# EAGLE board Thermocouple1 (EAGLE 9.6.2)
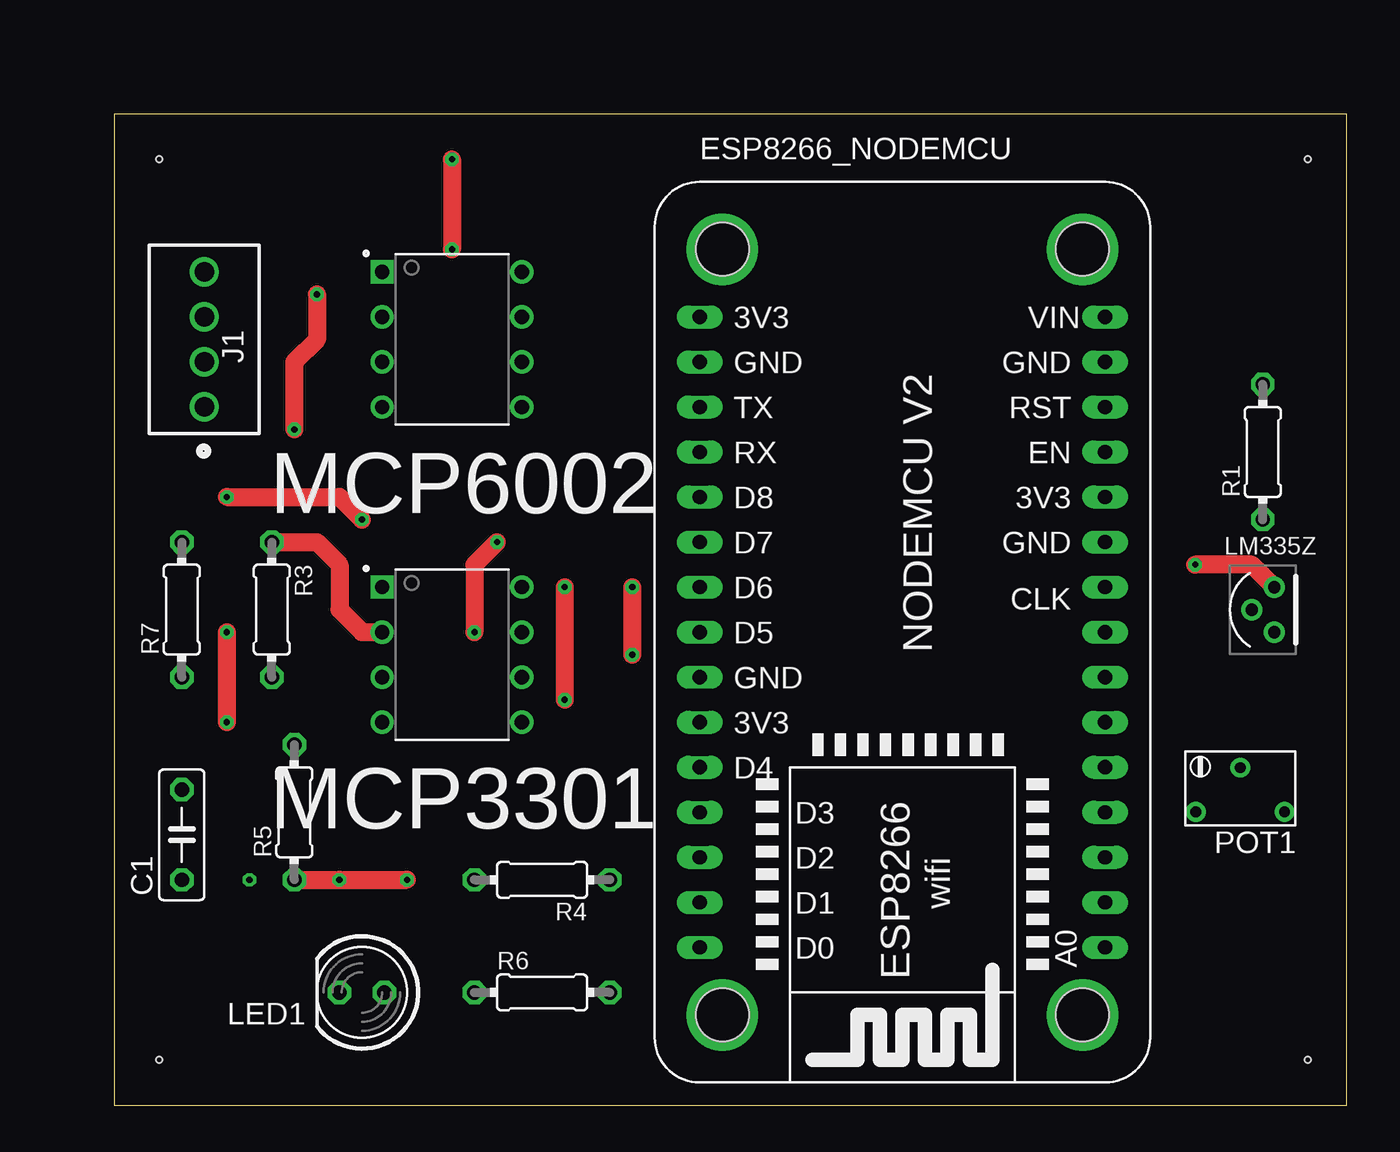
[diagram p0: board, top side]
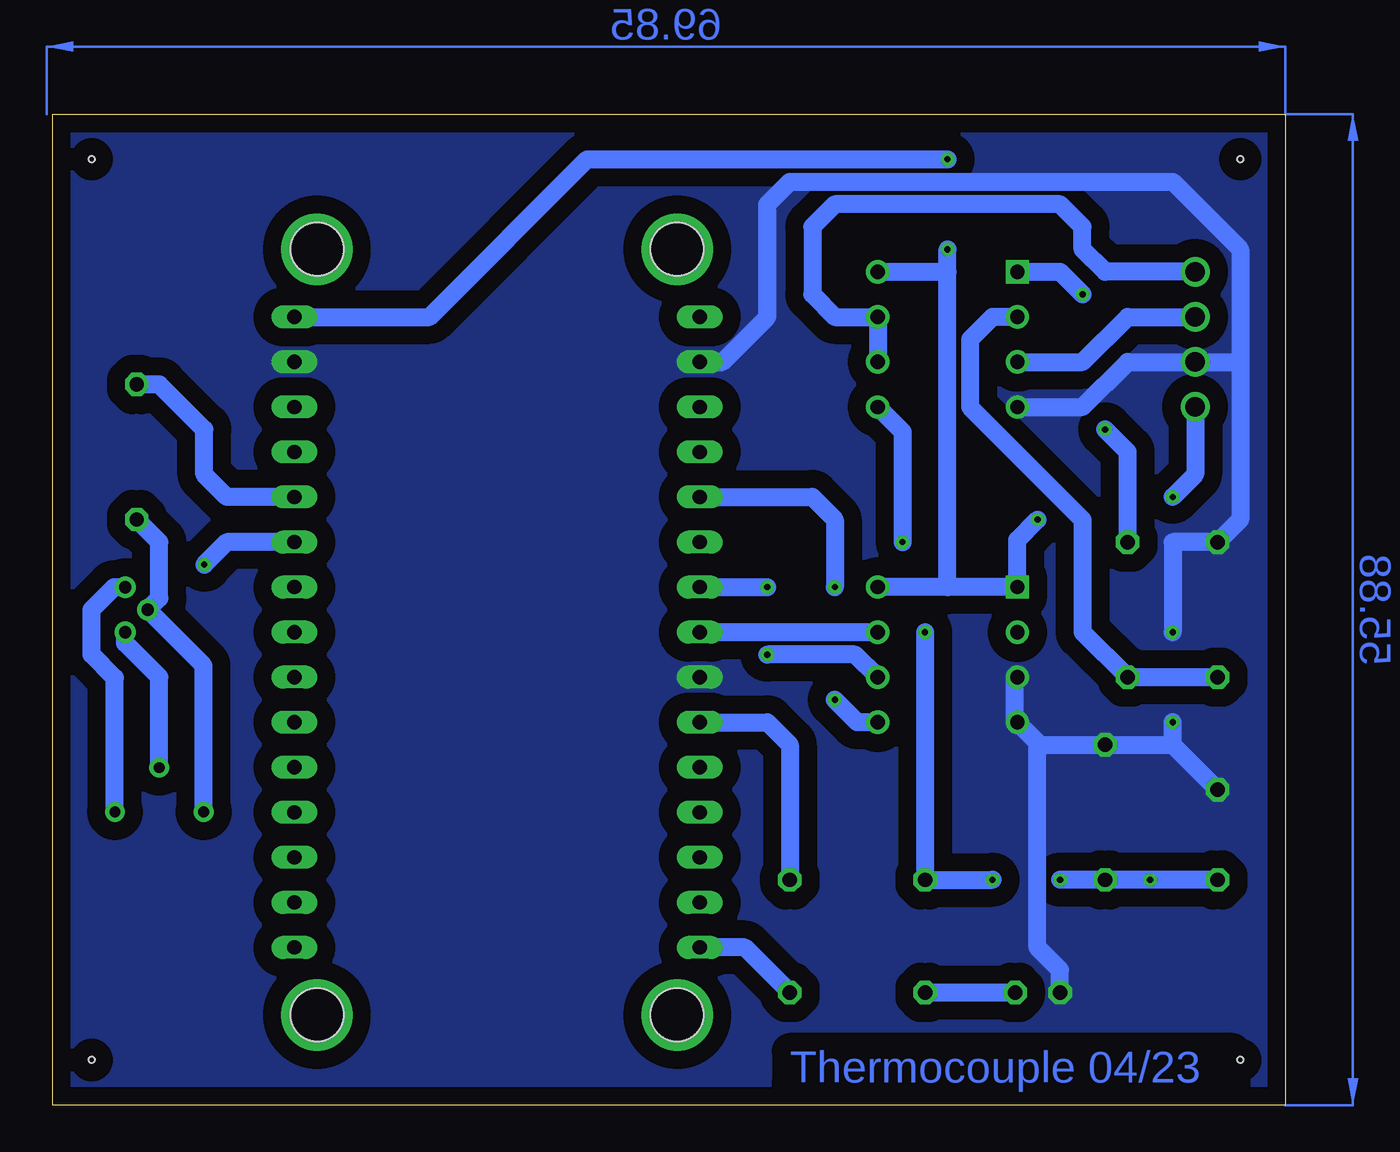
[diagram p1: board, bottom side, seen from below]

Size 69.52 x 55.87 mm. Coordinates in mm from the lower left corner, seen from the top.
Outline: 0,0 69.52,0 69.52,55.87 0,55.87 0,0
Copper layers (1*16): Top 0.035mm / dielectric 1.5mm / Bottom 0.035mm
Design rules "default": minimum track width 6mil, minimum drill 0.35mm, track to track 6mil, track to pad 6mil, pad to pad 6mil, via to via 6mil, smd to smd 6mil, copper to edge 40mil, drill to drill 6mil, minimum pad ring 10mil, minimum via ring 8mil, stop-mask expansion 4mil, vias tented up to drill 0mil, thermal gap 10mil
Holes 0.35 mm at 2.54,53.34 67.31,53.34 2.54,2.54 67.31,2.54

## Footprints (pad centres in the part's own frame; a part is rotated, then mirrored left to right if it is on the bottom)
C050-025X075 = drill 0.813 octagon: 1 -2.54,0; 2 2.54,0
NODEMCU_ESP8266 = drill 0.8 long: 3V3@1 -11.43,19.05; 3V3@2 -11.43,-3.81; 3V3@3 11.43,8.89; A0 11.43,-16.51; CLK 11.43,3.81; CMD 11.43,-1.27; D0 -11.43,-16.51; D1 -11.43,-13.97; D2 -11.43,-11.43; D3 -11.43,-8.89; D4 -11.43,-6.35; D5 -11.43,1.27; D6 -11.43,3.81; D7 -11.43,6.35; D8 -11.43,8.89; EN 11.43,11.43; GND@1 -11.43,16.51; GND@2 -11.43,-1.27; GND@3 11.43,6.35; GND@4 11.43,16.51; RST 11.43,13.97; RSV1 11.43,-11.43; RSV2 11.43,-13.97; RX -11.43,11.43; SD1 11.43,-3.81; SD2 11.43,-6.35; SD3 11.43,-8.89; SDO 11.43,1.27; TX -11.43,13.97; VIN 11.43,19.05 | drill 3: P$31 10.16,22.86; P$32 -10.16,22.86; P$33 -10.16,-20.32; P$34 10.16,-20.32 | hole 3: 10.16,22.86; 10.16,-20.32; -10.16,-20.32; -10.16,22.86
1725672-4-2.54 = drill 1.1 pad 1.65: 1 0,0; 2 2.54,0; 3 5.08,0; 4 7.62,0
LED5MM = drill 0.813 octagon: A -1.27,0; K 1.27,0
STMICROELECTRONICS_LM335Z_0 = drill 0.7 pad 1.2: 1 -0.62,0; 2 0.65,-1.27; 3 0.65,1.27
DIP787W46P254L927H533Q8 = drill 0.8 square: 1 -3.935,3.81 | drill 0.8: 2 -3.935,1.27; 3 -3.935,-1.27; 4 -3.935,-3.81; 5 3.935,-3.81; 6 3.935,-1.27; 7 3.935,1.27; 8 3.935,3.81
RTRIM74W = drill 0.61: 1 -1.25,-2.5; 2 1.25,0; 3 -1.25,2.5
0204/7 = drill 0.813 octagon: 1 -3.81,0; 2 3.81,0

## Placement (x,y rotation side)
C1  100nF  [C050-025X075]  3.81,15.24 90 top
ESP8266_NODEMCU  NODEMCU_ESP8266  [NODEMCU_ESP8266]  44.45,25.4 0 top
J1  1725672  [1725672-4-2.54]  5.08,39.37 90 top
LED1  [LED5MM]  13.97,6.35 180 top
LM335Z  STMICROELECTRONICS_LM335ZSTMICROELECTRONICS_LM335Z_0_0  [STMICROELECTRONICS_LM335Z_0]  64.77,27.94 0 top
MCP3301  MCP3301-CI/P  [DIP787W46P254L927H533Q8]  19.05,25.4 0 top
MCP6002  MCP6002-I/P  [DIP787W46P254L927H533Q8]  19.05,43.18 0 top
POT1  [RTRIM74W]  63.5,17.78 90 top
R1  600Ω  [0204/7]  64.77,36.83 90 top
R3  [0204/7]  8.89,27.94 270 top
R4  30kΩ  [0204/7]  24.13,12.7 180 top
R5  10kΩ  [0204/7]  10.16,16.51 90 top
R6  220Ω  [0204/7]  24.13,6.35 0 top
R7  [0204/7]  3.81,27.94 90 top

## Library data of the parts
C1 = rcl; SPICEPREFIX: C
ESP8266_NODEMCU = nodemcu_esp8266
J1 = 1725672; AVAILABILITY: In Stock; DESCRIPTION: ROHS / BORNIER FIXE CI 1RX4C / TYPE MPT 0-5/ 4-2-54 / BOX 50 PCS; MF: Phoenix Contact; MP: 17 25 67 2; PACKAGE: None; PRICE: None
LED1 = led
LM335Z = LM335Z_st; CENTROID_NOT_SPECIFIED: No; DATASHEET: http://www.st.com/content/ccc/resource/technical/document/datasheet/04/fa/9d/16/39/87/44/8d/CD00000459.pdf/files/CD00000459.pdf/jcr:content/translations/en.CD00000459.pdf; DIGIKEY_DESCRIPTION: IC SENSOR TEMP ANLG VOLT TO-92-3; DIGIKEY_PART_NUMBER: 497-1584-ND; IPC_LAND_PATTERN_NAME: TO-92; LEAD_FREE: yes; MF: STMicroelectronics; MOUSER_PART_NUMBER: 511-LM335Z; MPN: LM335Z; PACKAGE: TO-92-3; PREFIX: U; ROHS: yes; TEMPERATURE_RANGE_HIGH: +100°C; TEMPERATURE_RANGE_LOW: -40°C
MCP3301 = MCP3301-CI_P; AVAILABILITY: In Stock; DESCRIPTION: 13 Bit Analog to Digital Converter 1 Input 1 SAR 8-PDIP; MF: Microchip; MP: MCP3301-CI/P; PACKAGE: DIP-8 Microchip; PRICE: None; PURCHASE-URL: https://pricing.snapeda.com/search/part/MCP3301-CI/P/?ref=eda
MCP6002 = MCP6002-I_P; AVAILABILITY: In Stock; DESCRIPTION: General Purpose Amplifier 2 Circuit Rail-to-Rail 8-PDIP; MF: Microchip; MP: MCP6002-I/P; PACKAGE: DIP-8 Microchip; PRICE: None; PURCHASE-URL: https://pricing.snapeda.com/search/part/MCP6002-I/P/?ref=eda
POT1 = rcl; SPICEMODEL: X; SPICEPREFIXL: POT
R1 R3-R7 = rcl; SPICEPREFIX: R

## Nets
3V3: ESP8266_NODEMCU.3V3@1
GND: C1.2 ESP8266_NODEMCU.GND@1 ESP8266_NODEMCU.GND@2 ESP8266_NODEMCU.GND@4 J1.2 LED1.K MCP3301.3 MCP3301.4 MCP6002.4 R5.2 R7.2
N$1: ESP8266_NODEMCU.D5 MCP3301.7
N$2: ESP8266_NODEMCU.GND@3 LM335Z.3 POT1.1
N$3: ESP8266_NODEMCU.D6 MCP3301.6
N$4: ESP8266_NODEMCU.D8 MCP3301.5
N$5: MCP3301.2 MCP6002.1 R3.1
N$6: LED1.A R6.1
N$7: C1.1 MCP6002.5 R4.2 R5.1
N$8: ESP8266_NODEMCU.3V3@3 R1.2
N$9: J1.3 MCP6002.3
N$10: LM335Z.1 POT1.3 R1.1
N$11: LM335Z.2 POT1.2
N$12: J1.4 MCP6002.6 MCP6002.7
N$13: ESP8266_NODEMCU.3V3@2 R4.1
N$14: MCP6002.2 R3.2 R7.1
N$15: ESP8266_NODEMCU.D0 R6.2
VCC: ESP8266_NODEMCU.VIN J1.1 MCP3301.1 MCP3301.8 MCP6002.8

## Tracks (layer width: path | path; a pad name or v marks a point on that pad's centre or on a via)
GND  (via drill 0.35)
  Top 1.016: v6.35,26.67 v6.35,21.59
  Bottom 1.016: MCP6002.4 11.43,39.37 8.89,41.91 J1.2 2.54,41.91 | 2.54,41.91 2.54,33.02 R7.2 6.35,31.75 v6.35,26.67 | R5.2 6.35,20.32 | 6.35,20.32 v6.35,21.59 | C1.2 6.35,20.32 | ESP8266_NODEMCU.GND@1 31.75,41.91 29.21,44.45 29.21,50.8 27.94,52.07 6.35,52.07 2.54,48.26 2.54,41.91 | R5.2 10.29,20.45 | 15.24,24.13 15.24,21.71 MCP3301.4 13.85,20.32 | 13.85,20.32 R5.2 | LED1.K 12.7,7.62 13.97,8.89 13.97,20.2 13.85,20.32
  pour Bottom (isolate 1.016, no thermals): 0,0 0,55.88 69.85,55.88 69.85,0
N$1
  Bottom 1.016: ESP8266_NODEMCU.D5 MCP3301.7
N$2  (via drill 0.35)
  Top 1.016: LM335Z.3 64.15,30.48 v60.96,30.48
  Bottom 1.016: POT1.1 66,24.09 67.31,25.4 67.31,27.94 66.04,29.21 LM335Z.3 | ESP8266_NODEMCU.GND@3 59.69,31.75 v60.96,30.48
N$3  (via drill 0.35)
  Top 1.016: v29.21,29.21 v29.21,25.4
  Bottom 1.016: ESP8266_NODEMCU.D6 v29.21,29.21 | MCP3301.6 24.25,25.4 v29.21,25.4
N$4  (via drill 0.35)
  Top 1.016: v25.4,29.21 v25.4,22.86
  Bottom 1.016: v25.4,29.21 25.4,33.02 26.67,34.29 ESP8266_NODEMCU.D8 | MCP3301.5 24.13,21.59 v25.4,22.86
N$5  (via drill 0.35)
  Top 1.016: v11.43,45.72 11.43,43.18 10.16,41.91 v10.16,38.1 | R3.1 11.43,31.75 12.7,30.48 12.7,27.94 13.97,26.67 MCP3301.2
  Bottom 1.016: v11.43,45.72 12.7,46.99 MCP6002.1 | R3.1 8.89,36.83 v10.16,38.1
N$6
  Bottom 1.016: R6.1 LED1.A
N$7  (via drill 0.35)
  Top 1.016: v21.59,31.75 20.32,30.48 v20.32,26.67 | v16.51,12.7 v12.7,12.7 R5.1
  Bottom 1.016: C1.1 v7.62,12.7 v12.7,12.7 | MCP6002.5 21.59,37.98 v21.59,31.75 | v16.51,12.7 R4.2 v20.32,26.67
N$8
  Bottom 1.016: ESP8266_NODEMCU.3V3@3 59.69,34.29 60.96,35.56 60.96,38.1 63.5,40.64 R1.2
N$9
  Bottom 1.016: MCP6002.3 11.43,41.91 8.89,44.45 J1.3
N$10
  Bottom 1.016: R1.1 63.5,31.75 63.5,28.59 LM335Z.1 61,24.79 POT1.3
N$11
  Bottom 1.016: POT1.2 63.5,24.13 65.42,26.05 LM335Z.2
N$12
  Bottom 1.016: J1.4 10.16,46.99 11.43,48.26 11.43,49.53 12.7,50.8 25.4,50.8 26.67,49.53 26.67,45.72 25.4,44.45 MCP6002.7 MCP6002.6
N$13
  Bottom 1.016: ESP8266_NODEMCU.3V3@2 29.21,21.59 27.94,20.32 R4.1
N$14
  Bottom 1.016: R7.1 R3.2 11.43,26.67 11.43,33.02 17.78,39.37 17.78,43.18 16.51,44.45 MCP6002.2
N$15
  Bottom 1.016: R6.2 30.48,8.89 ESP8266_NODEMCU.D0
VCC  (via drill 0.35)
  Top 1.016: v6.35,34.29 12.7,34.29 v13.97,33.02 | v19.05,53.34 v19.05,48.26
  Bottom 1.016: 19.05,29.21 MCP3301.1 15.11,31.88 v13.97,33.02 | 19.05,29.21 MCP3301.8 | v6.35,34.29 5.08,35.56 J1.1 | 19.05,29.21 19.05,46.99 | 19.05,46.99 v19.05,48.26 | MCP6002.8 19.05,46.99 | ESP8266_NODEMCU.VIN 48.26,44.45 39.37,53.34 v19.05,53.34
(copper drawn outside any net)
  shapes: Bottom area x2

## Text on the board
Bottom: Thermocouple 04/23